# Altium PCB EncoderArm_Photo.PcbDoc
Units mil, origin at the board's own origin, x right, y up, seen from the top; angles counter-clockwise.
Board outline 1290 x 2525 mil, 2 copper layers (Top Layer, Bottom Layer); 9 components, 8 nets, 33 pads, 6 vias.
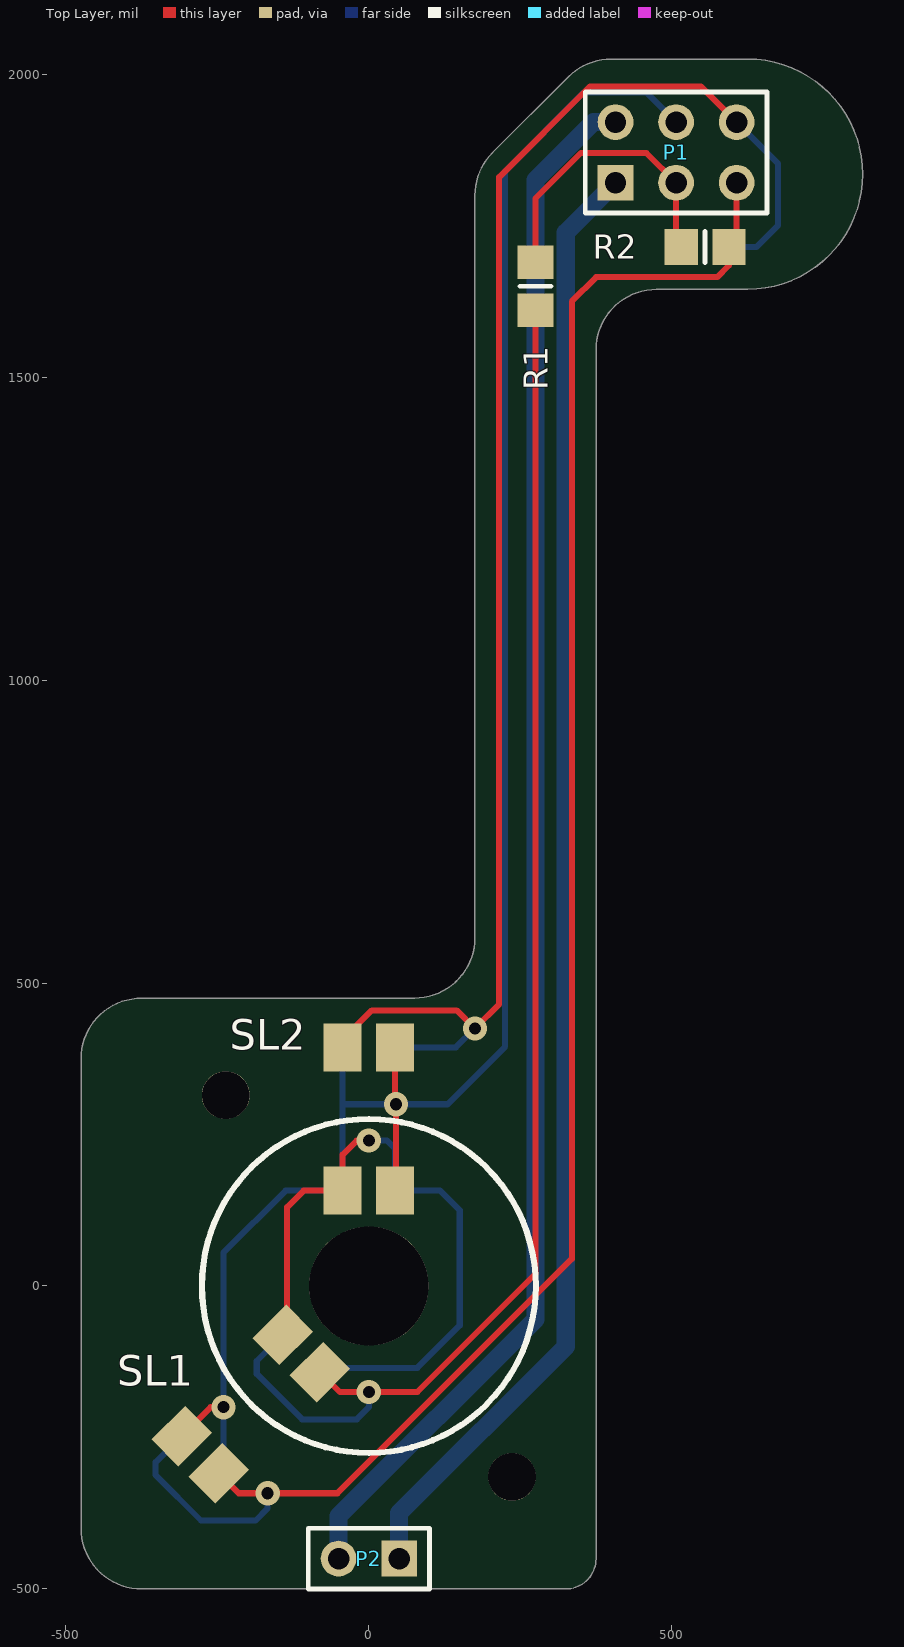
[diagram p0: Top Layer view]
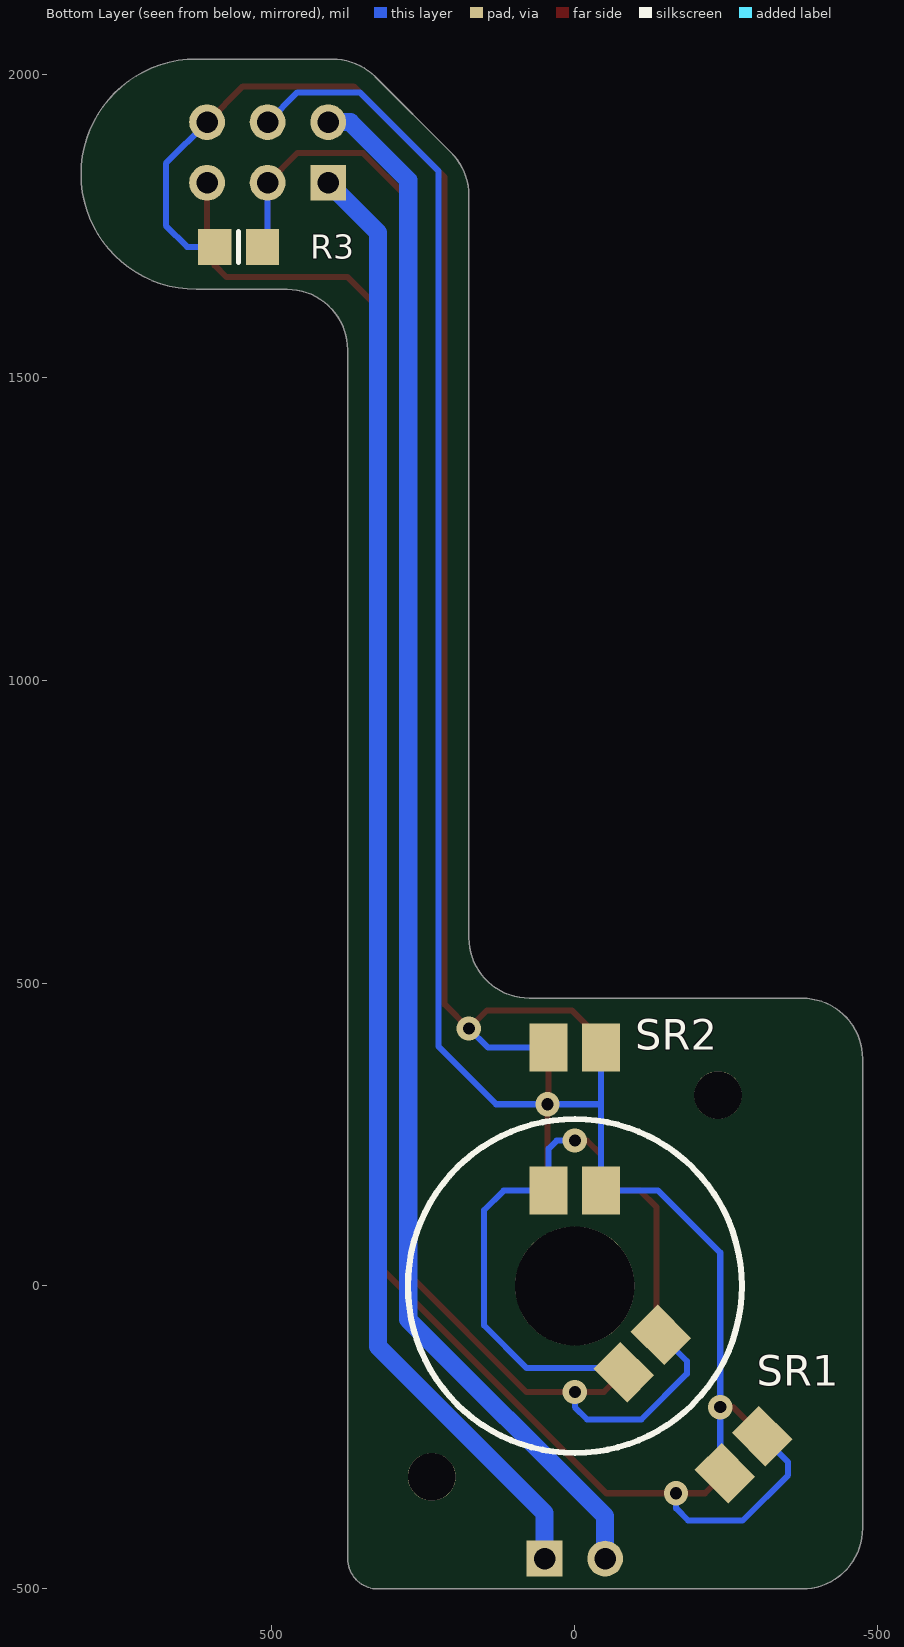
[diagram p1: Bottom Layer view, seen from below]

## Layer stack, top to bottom
Top Solder: solder mask 0.4, Solder Resist, Dk 3.5
Top Layer: signal copper 1.4
Dielectric 1: dielectric 12.6, FR-4, Dk 4.8
Bottom Layer: signal copper 1.4
Bottom Solder: solder mask 0.4, Solder Resist, Dk 3.5

## Board outline
-475,-400 ccw(c-375,-400) -375,-500 325,-500 ccw(c325,-450) 375,-450 375,1545 cw(c475,1545) 475,1645 625,1645 ccw(c625,1835) 625,2025 400,2025 ccw(c400,1925) 329.29,1995.71 204.29,1870.71 ccw(c275,1800) 175,1800 175,575 cw(c75,575) 75,475 -375,475 ccw(c-375,375) -475,375

## Design rules (kind name [scope] priority, off if disabled: settings)
Clearance [All] p1: gap=10
PolygonConnect [All] p1: connectstyle=Relief reliefconductorwidth=10 reliefentries=4 polygonreliefangle="90 Angle" airgapwidth=10
RoutingVias [All] p1: holewidth=28 width=50 viastyle="Through Hole" minholewidth=28 minwidth=50 maxholewidth=28 maxwidth=50
SolderMaskExpansion [All] p1: expansion=4
Width [All] p1: maxlimit=30 minlimit=10 preferedwidth=10
30 further rules are at their usual default settings.

## Classes and differential pairs
net class Power: M1A M1B

## Components (designator, comment, footprint, x,y, rotation, side; value= is the part's Value field where it differs from the comment)
P1 "Header 3X2" HDR2X3 407.09,1820.87 r0 top locked
P2 "Motor" HDR1X2 50,-450 r180 top
R1 "Res2" 6-0805_M 275,1650 r90 top
R2 "Res2" 6-0805_M 555,1715 r180 top
R3 "Res2" 6-0805_M 555,1715 r180 bottom
SL1 "EE-SX1109 PhotoInterrupter" EE-SX1109 -194.87,-194.87 r225 top locked
SL2 "EE-SX1109 PhotoInterrupter" EE-SX1109 0,275.59 r90 top
SR1 "EE-SX1109 PhotoInterrupter" EE-SX1109 -194.87,-194.87 r225 bottom locked
SR2 "EE-SX1109 PhotoInterrupter" EE-SX1109 0,275.59 r90 bottom

## Footprints (in the part's own frame and the unit in brackets; to place one, negate y for a bottom-side part, rotate by r counter-clockwise, add the part's x,y. Pads: shape width x height; smd on the part's side, far side on the other; paste and mask are expansions set on the pad)
6-0805_M [mm] "Chip Resistor, Body 2.0x1.2mm, IPC Low Density"
  rect 1.4x1.5 smd: 1(-1,0) 2(1,0)
  silkscreen extent 0,-0.65 0,0.65, body extent -1.07,-0.7 1.07,0.7, height 0.7
EE-SX1109 [mm] "PhotoInterrupter ( E14 1461616 )"
  rect 2x1.6 smd: 1(-3,-1.1) 2(3,-1.1) 3(3,1.1) 4(-3,1.1)
HDR1X2 [mm] "Connector; Header; 2 Position"
  rect 1.5x1.5 hole 0.9: 1(0,0)
  round 1.5 hole 0.9: 2(2.54,0)
  silkscreen extent -1.27,-1.27 3.81,1.27
HDR2X3 [mm] "Connector; Header; 3x2 Position"
  rect 1.5x1.5 hole 0.9: 1(0,0)
  round 1.5 hole 0.9: 2(0,2.54) 3(2.54,0) 4(2.54,2.54) 5(5.08,0) 6(5.08,2.54)
  silkscreen extent -1.27,-1.27 6.35,3.81

## Part data
P1: "Header, 3-Pin, Dual row"
P2: library part "Header 2", "Header, 2-Pin"
R1 R2 R3: "Resistor"

## Free pads (board coordinates)
  round 78.74 hole 78.74: 0(-236.22,314.96) 0(236.22,-314.96)
  round 196.85 hole 196.85: 0(0,0)

## Via types
v1: diameter 40, hole 20, Top Layer to Bottom Layer, 6 vias

## Nets (pads, with @x,y where several pads share a name; then routed paths per layer and width w, separated by ;. In a path a pad name is that pad's centre, name@x,y a point inside that pad or via, vN(x,y) a via of type N, cw(c..) or ccw(c..) an arc to the next point about the centre after c; other vN are vias at no path point)
3V3: P1.3 R1.2 R2.2 R3.2 | length 607.9
  Top Layer w10: R1.2 275,1795 350,1870 457.95,1870 P1.3 507.09,1723.54 R2.2
  Bottom Layer w10: P1.3 507.09,1723.54 R3.2
GND: P1.4 SL1.2 SL2.1 SL2.2 SR1.2 SR2.1 SR2.2 | length 3275.6
  Top Layer w10: SL1.2 -261.25,-200 v1(-240,-200) ; SL2.1 45,159.17 v1(45,300) ; v1@43.31,301.69 SL2.2
  Bottom Layer w10: SR1.2 -240,-301.24 v1(-240,-200) -240,55 -137.52,157.48 SR2.1 -43.31,300 ; SR2.2 -43.31,300 ; P1.4 457.95,1970 355,1970 225,1840 225,395 130,300 v1(45,300) -43.31,300
M1A: P1.1 P2.1 | length 2418.8
  Bottom Layer w30: P2.1 50,-375 325,-100 325,1738.78 P1.1
M1B: P1.2 P2.2 | length 2581.4
  Bottom Layer w30: P2.2 -50,-380 275,-55 275,1825 370.87,1920.87 P1.2
NetR1_1: R1.1 SL1.4 SR1.4 | length 2372.3
  Top Layer w10: SL1.4 -47.71,-175 v1(0,-175) 80,-175 275,20 R1.1
  Bottom Layer w10: SR1.4 -185,-123.75 -185,-145 -110,-220 -20,-220 0,-200 v1(0,-175)
NetSL1_1: SL1.1 SL2.4 SR1.1 SR2.4 | length 1119.7
  Top Layer w10: SL1.1 -135,-73.75 -135,130 -107.52,157.48 SL2.4 -43.31,216.69 -20,240 v1(0,240)
  Bottom Layer w10: SR1.1 -73.76,-135 80,-135 150,-65 150,125 117.52,157.48 SR2.4 43.31,226.69 30,240 v1(0,240)
VOUT1: P1.5 R2.1 SL1.3 SR1.3 | length 3093.9
  Top Layer w10: SL1.3 -214.74,-342.03 v1(-167.03,-342.03) -52.03,-342.03 335,45 335,1625 375,1665 575,1665 594.37,1684.37 R2.1 607.09,1727.72 P1.5
  Bottom Layer w10: SR1.3 -352.03,-290.79 -352.03,-312.03 -277.03,-387.03 -187.03,-387.03 -167.03,-367.03 v1(-167.03,-342.03)
VOUT2: P1.6 R3.1 SL2.3 SR2.3 | length 2602.8
  Top Layer w10: SL2.3 -43.31,406.69 5,455 145,455 v1(175,425) 215,465 215,1830 365,1980 547.95,1980 P1.6
  Bottom Layer w10: SR2.3 143.7,393.7 v1(175,425) ; R3.1 640,1715 675,1750 675,1852.95 P1.6

## Silkscreen, mask and mechanical layers (free items; w line width, h text height)
Top Overlay:
  circle w10: c0,0 r275.59
Bottom Overlay:
  circle w10: c0,0 r275.59
Mechanical 1:
  lines w10: -475,-400 ccw(c-375,-400) -375,-500 325,-500 ccw(c325,-450) 375,-450 375,1545 cw(c475,1545) 475,1645 625,1645 ccw(c625,1835) 625,2025 400,2025 ccw(c400,1925) 329.29,1995.71 204.29,1870.71 ccw(c275,1800) 175,1800 175,575 cw(c75,575) 75,475 -375,475 ccw(c-375,375) -475,375 -475,-400